# EAGLE board LC_Board (EAGLE 9.6.2)
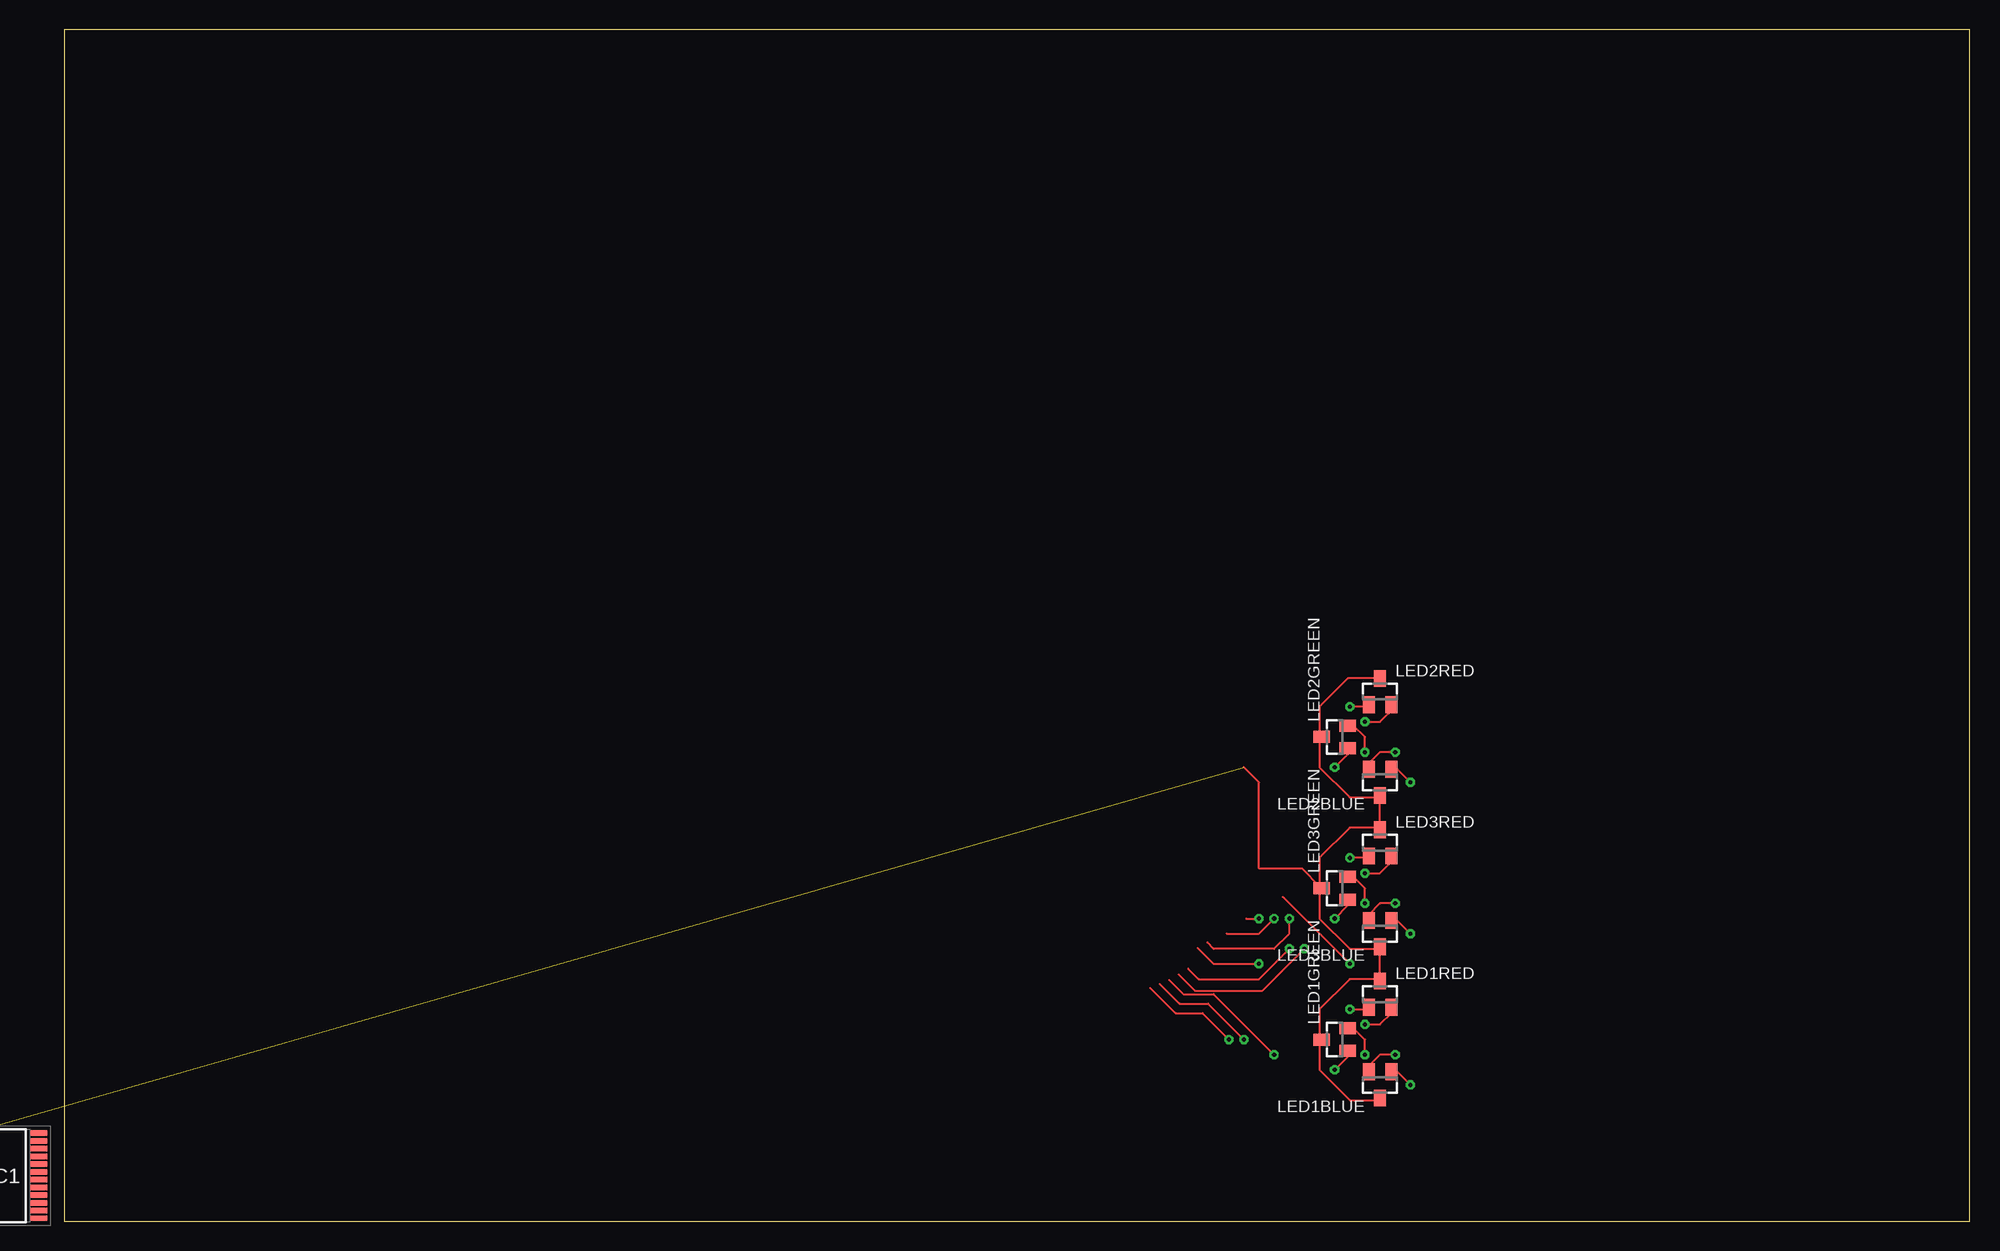
[diagram p0: board, top side]
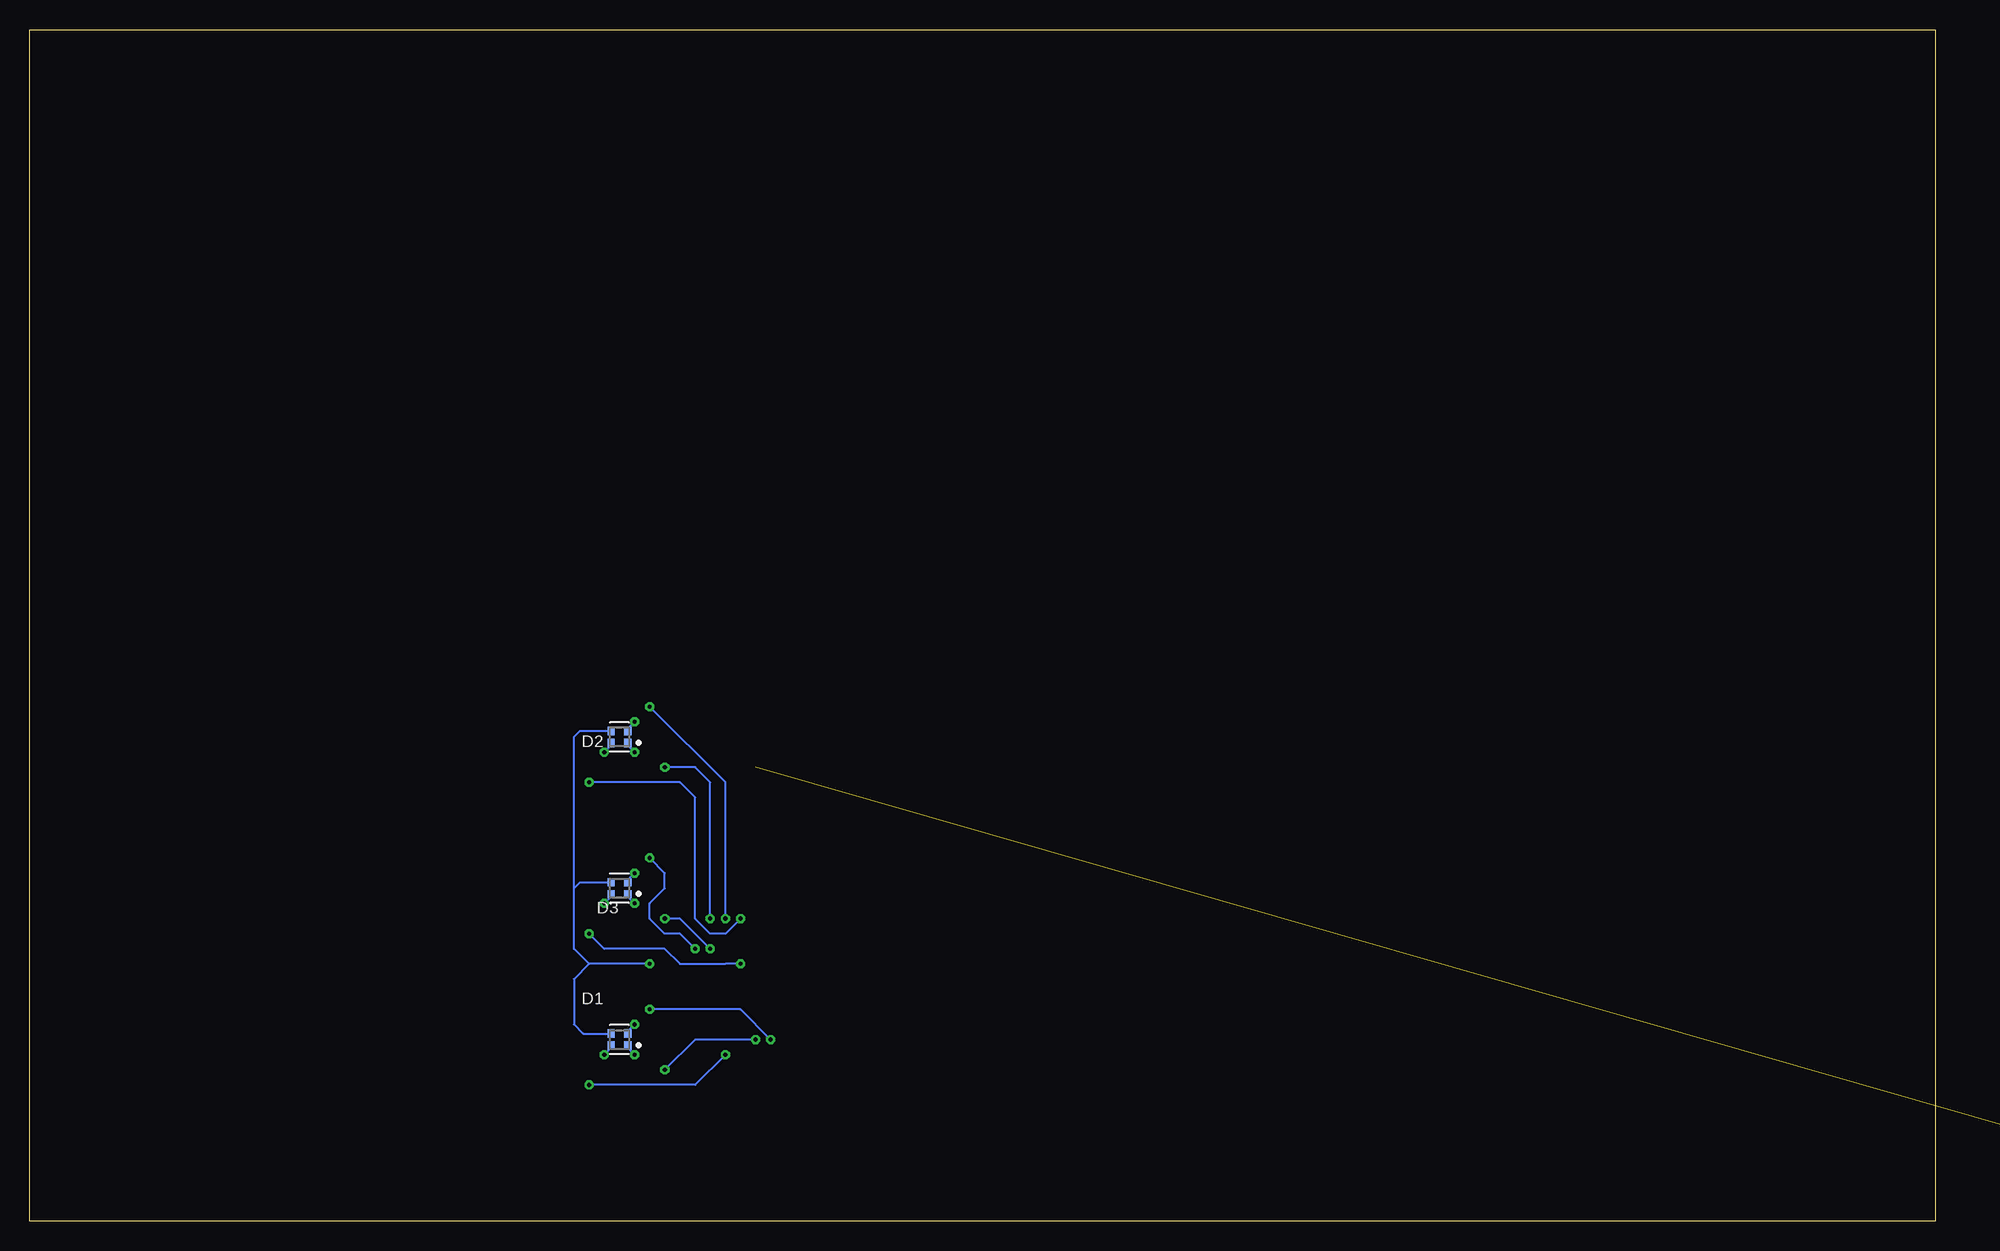
[diagram p1: board, bottom side, seen from below]

Size 160 x 100 mm. Coordinates in mm from the lower left corner, seen from the top.
Outline: 0,0 160,0 160,100 0,100 0,0
Copper layers (1*16): Top 0.035mm / dielectric 1.5mm / Bottom 0.035mm
Design rules "default *": minimum track width 6mil, minimum drill 0.35mm, track to track 6mil, track to pad 6mil, pad to pad 6mil, via to via 6mil, smd to smd 6mil, copper to edge 40mil, drill to drill 6mil, minimum pad ring 10mil, minimum via ring 8mil, stop-mask expansion 4mil, vias tented up to drill 0mil, thermal gap 10mil

## Footprints (pad centres in the part's own frame; a part is rotated, then mirrored left to right if it is on the bottom)
DIALIGHT_598-8710-307F_0 = smd 0.6 x 0.7: 1 -0.7,0.5; 2 0.7,0.5; 3 -0.7,-0.5; 4 0.7,-0.5
SOP65P638X110-24N = smd 1.45 x 0.45: 1 -2.925,3.575; 2 -2.925,2.925; 3 -2.925,2.275; 4 -2.925,1.625; 5 -2.925,0.975; 6 -2.925,0.325; 7 -2.925,-0.325; 8 -2.925,-0.975; 9 -2.925,-1.625; 10 -2.925,-2.275; 11 -2.925,-2.925; 12 -2.925,-3.575; 13 2.925,-3.575; 14 2.925,-2.925; 15 2.925,-2.275; 16 2.925,-1.625; 17 2.925,-0.975; 18 2.925,-0.325; 19 2.925,0.325; 20 2.925,0.975; 21 2.925,1.625; 22 2.925,2.275; 23 2.925,2.925; 24 2.925,3.575
TRANSISTOR-FET_SOT23 = smd 1 x 1.4: 1 -0.95,-1.1; 2 0.95,-1.1; 3 0,1.1

## Placement (x,y rotation side)
D1  DIALIGHT_598-8710-307FDIALIGHT_598-8710-307F_0_0  [DIALIGHT_598-8710-307F_0]  110.49,15.24 180 bottom
D2  DIALIGHT_598-8710-307FDIALIGHT_598-8710-307F_0_0  [DIALIGHT_598-8710-307F_0]  110.49,40.64 180 bottom
D3  DIALIGHT_598-8710-307FDIALIGHT_598-8710-307F_0_0  [DIALIGHT_598-8710-307F_0]  110.49,27.94 180 bottom
IC1  STP16C596M  [SOP65P638X110-24N]  -5.08,3.81 0 top
LED1BLUE  BSS138  [TRANSISTOR-FET_SOT23]  110.49,11.43 180 top
LED1GREEN  BSS138  [TRANSISTOR-FET_SOT23]  106.68,15.24 90 top
LED1RED  BSS138  [TRANSISTOR-FET_SOT23]  110.49,19.05 0 top
LED2BLUE  BSS138  [TRANSISTOR-FET_SOT23]  110.49,36.83 180 top
LED2GREEN  BSS138  [TRANSISTOR-FET_SOT23]  106.68,40.64 90 top
LED2RED  BSS138  [TRANSISTOR-FET_SOT23]  110.49,44.45 0 top
LED3BLUE  BSS138  [TRANSISTOR-FET_SOT23]  110.49,24.13 180 top
LED3GREEN  BSS138  [TRANSISTOR-FET_SOT23]  106.68,27.94 90 top
LED3RED  BSS138  [TRANSISTOR-FET_SOT23]  110.49,31.75 0 top

## Library data of the parts
D1-D3 = Dialight - 598-8710-307F; CENTROID_NOT_SPECIFIED: No; DATASHEET: https://media.digikey.com/pdf/Data%20Sheets/Dialight%20PDFs/598_Series_0606_Pkg.pdf; DIGIKEY_DESCRIPTION: DIODE LED RGB CLEAR 0606 SMD; DIGIKEY_PART_NUMBER: 350-2096-1-ND; LEAD_FREE: yes; MF: Dialight; MOUSER_PART_NUMBER: 645-598-8710-307F; MPN: 598-8710-307F; PACKAGE: LED_SMD; PREFIX: D; ROHS: yes; SPICEPREFIX: E; TEMPERATURE_RANGE_HIGH: +100°C; TEMPERATURE_RANGE_LOW: -40°C
IC1 = STP16C596M; DESCRIPTION: LED Display Drivers 16-Bit Curr LED Sink; HEIGHT: 1.1mm; MANUFACTURER_NAME: STMicroelectronics; MANUFACTURER_PART_NUMBER: STP16C596M
LED1BLUE LED1GREEN LED1RED LED2BLUE LED2GREEN LED2RED LED3BLUE LED3GREEN LED3RED = 52101-101-REV-A; SPICEPREFIX: Q

## Nets
3.3V_RAIL: D1.4 D2.4 D3.4
BLUE1: D1.2 LED1BLUE.2
BLUE2: D2.2 LED2BLUE.2
BLUE3: D3.2 LED3BLUE.2
D5: LED1RED.1
D6: LED1GREEN.1
D7: LED1BLUE.1
D8: LED3RED.1
D9: LED3GREEN.1
D10: LED3BLUE.1
D11: LED2GREEN.1
D12: LED2RED.1
D13: LED2BLUE.1
GND: IC1.1 LED1BLUE.3 LED1GREEN.3 LED1RED.3 LED2BLUE.3 LED2GREEN.3 LED2RED.3 LED3BLUE.3 LED3GREEN.3 LED3RED.3
GREEN1: D1.1 LED1GREEN.2
GREEN2: D2.1 LED2GREEN.2
GREEN3: D3.1 LED3GREEN.2
RED1: D1.3 LED1RED.2
RED2: D2.3 LED2RED.2
RED3: D3.3 LED3RED.2

## Tracks (layer width: path | path; a pad name or v marks a point on that pad's centre or on a via)
3.3V_RAIL  (via drill 0.35)
  Top 0.152: v107.95,21.59 102.33,27.21
  Bottom 0.152: 114.3,27.94 114.3,22.86 113.03,21.59 | 114.3,27.94 113.8,28.44 D3.4 | v107.95,21.59 113.03,21.59 | D1.4 113.53,15.74 114.3,16.51 114.3,20.32 113.03,21.59 | D2.4 113.8,41.14 114.3,40.64 114.3,27.94
BLUE1  (via drill 0.35)
  Top 0.152: v111.76,13.97 110.49,13.97 109.54,13.02 LED1BLUE.2
  Bottom 0.152: D1.2 111.19,14.54 v111.76,13.97
BLUE2  (via drill 0.35)
  Top 0.152: LED2BLUE.2 109.54,38.1 109.54,38.42 110.49,39.37 v111.76,39.37
  Bottom 0.152: D2.2 111.19,39.94 v111.76,39.37
BLUE3  (via drill 0.35)
  Top 0.152: v111.76,26.67 110.49,26.67 109.54,25.72 LED3BLUE.2
  Bottom 0.152: D3.2 111.19,27.24 v111.76,26.67
D5  (via drill 0.35)
  Top 0.152: 91.18,19.59 93.32,17.45 95.58,17.45 v97.79,15.24 | LED1RED.1 109.37,17.78 v107.95,17.78
  Bottom 0.152: v97.79,15.24 100.33,17.78 v107.95,17.78
D6  (via drill 0.35)
  Top 0.152: 91.98,19.92 93.65,18.25 96.05,18.25 v99.06,15.24 | v106.68,12.7 107.95,13.97 107.95,14.12 LED1GREEN.1
  Bottom 0.152: v106.68,12.7 104.14,15.24 v99.06,15.24
D7  (via drill 0.35)
  Top 0.152: 92.78,20.25 93.98,19.05 96.52,19.05 v101.6,13.97 | v113.03,11.43 111.93,12.53 LED1BLUE.1
  Bottom 0.152: v101.6,13.97 104.14,11.43 v113.03,11.43
D8  (via drill 0.35)
  Top 0.152: 93.58,20.72 94.94,19.36 100.64,19.36 v104.14,22.86 | LED3RED.1 109.37,30.48 v107.95,30.48
  Bottom 0.152: v104.14,22.86 105.41,24.13 106.68,24.13 107.95,25.4 107.95,26.67 106.68,27.94 106.68,29.21 v107.95,30.48
D9  (via drill 0.35)
  Top 0.152: 94.38,21.19 95.25,20.32 100.33,20.32 v102.87,22.86 | LED3GREEN.1 107.78,26.5 v106.68,25.4
  Bottom 0.152: v102.87,22.86 105.41,25.4 v106.68,25.4
D10  (via drill 0.35)
  Top 0.152: 95.18,22.93 96.52,21.59 v100.33,21.59 | v113.03,24.13 111.93,25.23 LED3BLUE.1
  Bottom 0.152: v113.03,24.13 111.76,22.86 106.68,22.86 105.41,21.59 101.6,21.59 v100.33,21.59
D11  (via drill 0.35)
  Top 0.152: v102.87,25.4 102.87,24.13 101.6,22.86 96.52,22.86 95.98,23.4 | LED2GREEN.1 107.78,39.2 v106.68,38.1
  Bottom 0.152: v102.87,25.4 102.87,36.83 104.14,38.1 v106.68,38.1
D12  (via drill 0.35)
  Top 0.152: 97.61,24.13 100.33,24.13 v101.6,25.4 | LED2RED.1 109.37,43.18 v107.95,43.18
  Bottom 0.152: v101.6,25.4 101.6,36.83 v107.95,43.18
D13  (via drill 0.35)
  Top 0.152: LED2BLUE.1 111.93,37.93 v113.03,36.83 | 99.24,25.4 v100.33,25.4
  Bottom 0.152: v113.03,36.83 105.41,36.83 104.14,35.56 104.14,25.4 102.87,24.13 101.6,24.13 v100.33,25.4
GND  (1 unrouted)
  Top 0.152: 110.49,10.16 LED1BLUE.3 110.32,10.16 107.95,10.16 105.41,12.7 105.41,15.07 LED1GREEN.3 105.41,15.41 105.41,17.78 107.95,20.32 110.32,20.32 LED1RED.3 LED3BLUE.3 110.41,22.95 | 110.41,32.94 110.32,33.02 107.95,33.02 105.41,30.48 105.41,28.11 | 110.41,32.94 LED3RED.3 | 105.41,28.11 LED3GREEN.3 105.41,27.77 105.41,25.4 107.95,22.86 110.32,22.86 110.41,22.95 | 110.49,22.86 110.41,22.95 | 105.41,28.11 103.91,29.61 100.33,29.61 100.33,36.83 99.06,38.1 | 110.41,32.94 110.49,33.02 LED3RED.3 | LED2RED.3 107.78,45.55 105.41,43.18 105.41,40.81 LED2GREEN.3 105.41,40.47 105.41,38.1 107.95,35.56 110.49,35.56 | LED2BLUE.3 110.49,35.56 | LED3RED.3 110.49,35.56
GREEN1  (via drill 0.35)
  Top 0.152: v109.22,13.97 109.22,15.24 108.27,16.19 LED1GREEN.2
  Bottom 0.152: D1.1 109.79,14.54 v109.22,13.97
GREEN2  (via drill 0.35)
  Top 0.152: v109.22,39.37 109.22,40.64 108.27,41.59 LED2GREEN.2
  Bottom 0.152: D2.1 109.79,39.94 v109.22,39.37
GREEN3  (via drill 0.35)
  Top 0.152: v109.22,26.67 109.22,27.94 107.95,29.21 107.78,29.04 LED3GREEN.2
  Bottom 0.152: D3.1 109.79,27.24 v109.22,26.67
RED1  (via drill 0.35)
  Top 0.152: v109.22,16.51 110.49,16.51 111.44,17.46 LED1RED.2
  Bottom 0.152: D1.3 109.79,15.94 v109.22,16.51
RED2  (via drill 0.35)
  Top 0.152: v109.22,41.91 110.49,41.91 111.76,43.18 111.59,43.35 LED2RED.2
  Bottom 0.152: D2.3 109.79,41.34 v109.22,41.91
RED3  (via drill 0.35)
  Top 0.152: v109.22,29.21 110.49,29.21 111.44,30.16 LED3RED.2
  Bottom 0.152: D3.3 109.79,28.64 v109.22,29.21